# EAGLE board lightclock.0 (EAGLE 6.2)
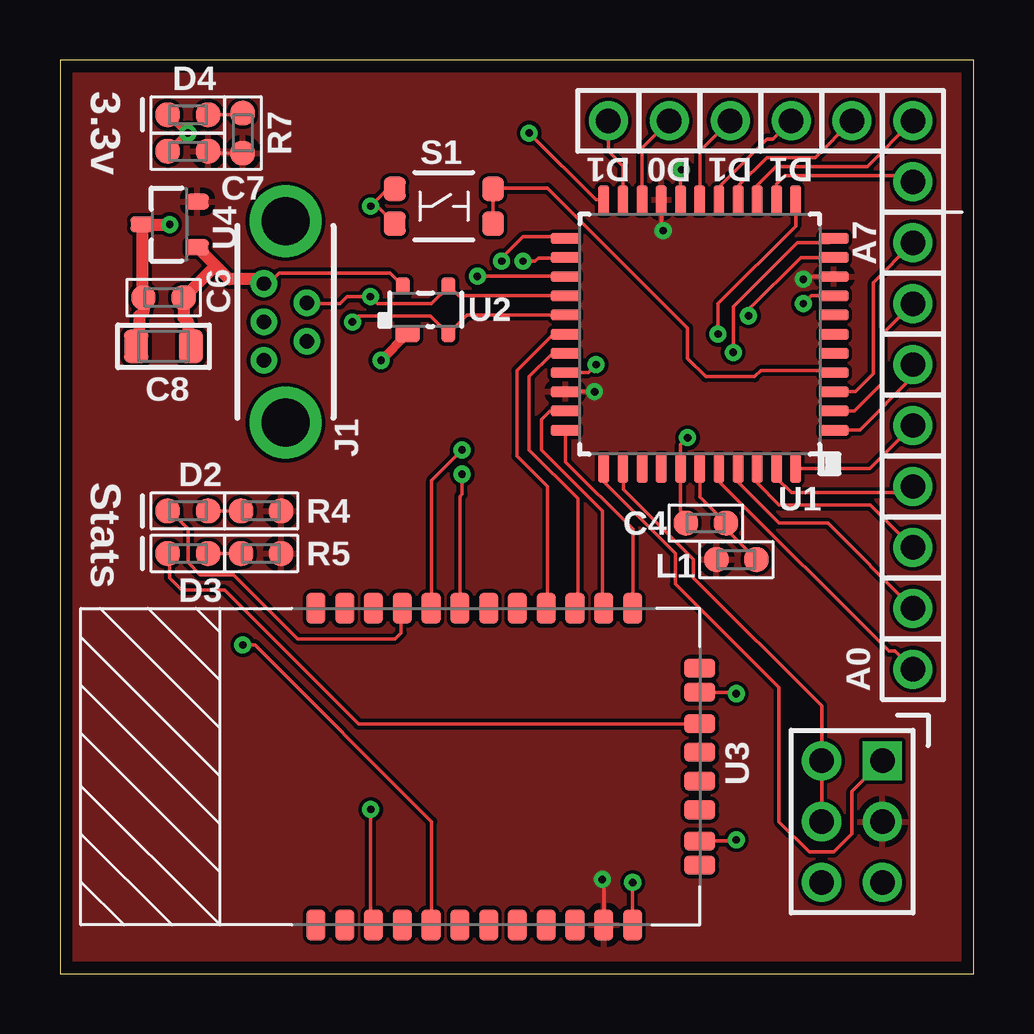
[diagram p0: board, top side]
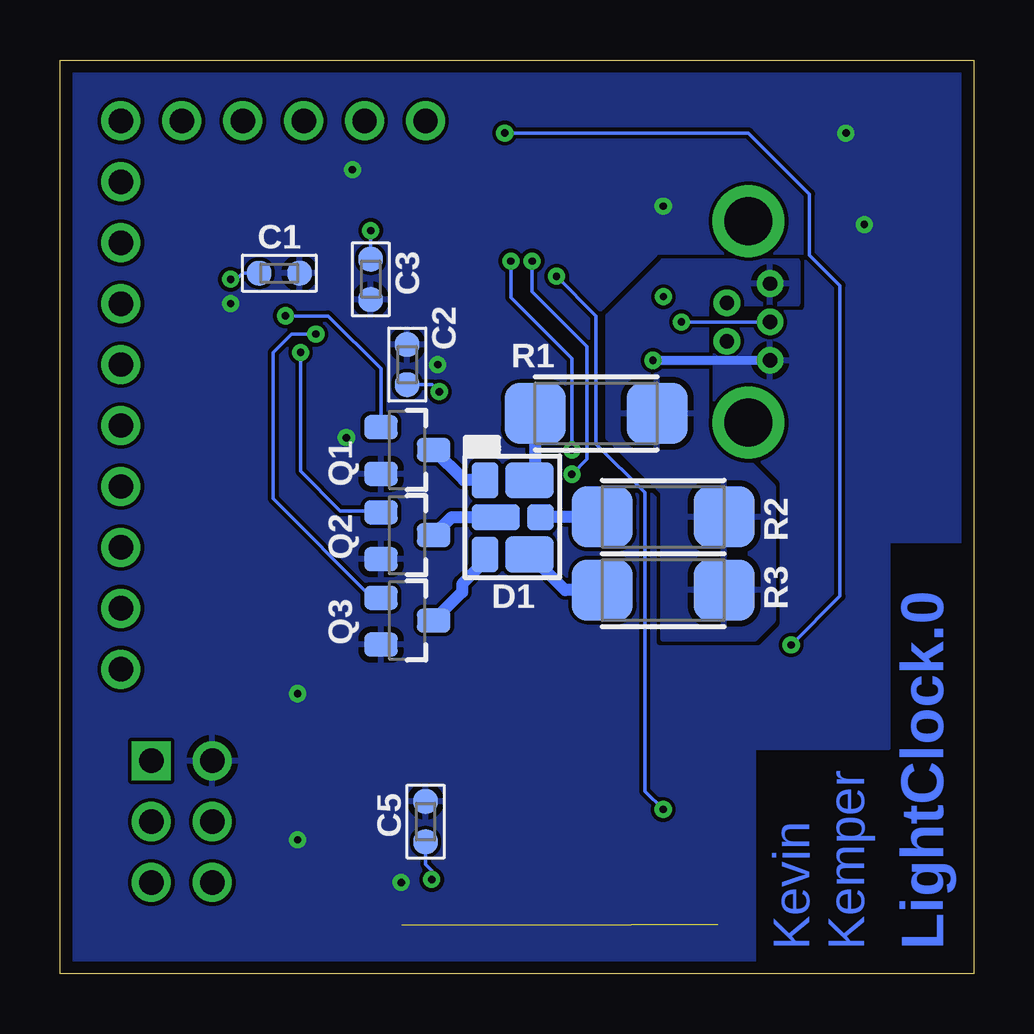
[diagram p1: board, bottom side, seen from below]

Size 38.1 x 38.1 mm. Coordinates in mm from the lower left corner, seen from the top.
Outline: 0,0 38.1,0 38.1,38.1 0,38.1 0,0
Copper layers (1*16): Top 0.035mm / dielectric 1.5mm / Bottom 0.035mm
Design rules: minimum track width 6mil, minimum drill 12mil, track to track 6mil, track to pad 6mil, pad to pad 6mil, via to via 6mil, smd to smd 6mil, copper to edge 20mil, drill to drill 8mil, minimum pad ring 10mil, minimum via ring 8mil, stop-mask expansion 4mil, vias tented up to drill 0mil, thermal gap 10mil

## Footprints (pad centres in the part's own frame; a part is rotated, then mirrored left to right if it is on the bottom)
0603 = smd 1.016 x 1.016: 1 0,0.838; 2 0,-0.838
0805 = smd 1.016 x 1.397: 1 -1.143,0; 2 1.143,0
LRTDC9TP-EAFB-GHQN = smd 2 x 1.5: A1 -0.524,-1.536; A3 -0.524,1.564 | smd 1.1 x 1.1: A2 -0.974,0.014 | smd 1.1 x 1.5: C1 1.326,-1.536; C3 1.326,1.564 | smd 2 x 1.1: C2 0.876,0.014
0603-POL = smd 1.016 x 1.016: 1 0,0.838; 2 0,-0.838
651005136421 = drill 0.6 pad 1.016: 1 0.9,-1.6; 2 -0.9,-0.8; 3 0.9,0; 4 -0.9,0.8; 5 0.9,1.6 | drill 2: 6 0,4.2; 7 0,-4.2
HEADER-1X1 = drill 1.016 pad 1.626: 1 0,0
HEADER-2X6 = drill 1.016 pad 1.626 square: 1 0,0 | drill 1.016 pad 1.626: 2 2.54,0; 3 5.08,0; 4 5.08,-2.54; 5 2.54,-2.54; 6 0,-2.54
SOT-23 = smd 1 x 1.4: 1 -0.95,-1.1; 2 1,-1.1; 3 0,1.1
2010 = smd 2.54 x 2.54: 1 -2.54,0; 2 2.54,0
KMR211GLFS = smd 0.9 x 1: 1 -2.05,-0.725; 2 -2.05,0.725; 3 2.05,-0.725; 4 2.05,0.725
ATXMEGA16A4U-AUR = smd 1.2 x 0.45: 1 -5.6,4; 2 -5.6,3.2; 3 -5.6,2.4; 4 -5.6,1.6; 5 -5.6,0.8; 6 -5.6,0; 7 -5.6,-0.8; 8 -5.6,-1.6; 9 -5.6,-2.4; 10 -5.6,-3.2; 11 -5.6,-4; 23 5.6,-4; 24 5.6,-3.2; 25 5.6,-2.4; 26 5.6,-1.6; 27 5.6,-0.8; 28 5.6,0; 29 5.6,0.8; 30 5.6,1.6; 31 5.6,2.4; 32 5.6,3.2; 33 5.6,4 | smd 0.45 x 1.2: 12 -4,-5.6; 13 -3.2,-5.6; 14 -2.4,-5.6; 15 -1.6,-5.6; 16 -0.8,-5.6; 17 0,-5.6; 18 0.8,-5.6; 19 1.6,-5.6; 20 2.4,-5.6; 21 3.2,-5.6; 22 4,-5.6; 34 4,5.6; 35 3.2,5.6; 36 2.4,5.6; 37 1.6,5.6; 38 0.8,5.6; 39 0,5.6; 40 -0.8,5.6; 41 -1.6,5.6; 42 -2.4,5.6; 43 -3.2,5.6; 44 -4,5.6
PRTR5V0U2X = smd 1 x 0.7: 1 -0.75,-1 | smd 0.6 x 0.7: 2 0.95,-1; 3 0.95,1; 4 -0.95,1
RN-42 = smd 1.3 x 0.8: 1 -13.2,16; 2 -13.2,14.8; 3 -13.2,13.6; 4 -13.2,12.4; 5 -13.2,11.2; 6 -13.2,10; 7 -13.2,8.8; 8 -13.2,7.6; 9 -13.2,6.4; 10 -13.2,5.2; 11 -13.2,4; 12 -13.2,2.8; 13 0,2.8; 14 0,4; 15 0,5.2; 16 0,6.4; 17 0,7.6; 18 0,8.8; 19 0,10; 20 0,11.2; 21 0,12.4; 22 0,13.6; 23 0,14.8; 24 0,16 | smd 0.8 x 1.3: 28 -3.5,0; 29 -9.7,0; 30 -2.5,0; 31 -4.8,0; 32 -6,0; 33 -7.2,0; 34 -8.4,0; 35 -10.7,0
AP7313-33SAG-7 = smd 0.65 x 0.95: 1 -0.95,-1.15; 2 0.95,-1.15; 3 0,1.15

## Placement (x,y rotation side)
C1  0.1 uF  [0603]  28.96,29.21 90 bottom
C2  0.1 uF  [0603]  23.62,25.4 180 bottom
C3  0.1 uF  [0603]  25.15,28.96 0 bottom
C4  0.1 uF  [0603]  26.92,18.8 270 top
C5  0.1 uF  [0603]  22.86,6.35 180 bottom
C6  1 uF  [0603]  4.32,28.19 270 top
C7  1 uF  [0603]  5.33,34.29 270 top
C8  10 uF  [0805]  4.32,26.16 180 top
D1  LED-LRTDC9TP  [LRTDC9TP-EAFB-GHQN]  19.05,19.05 180 bottom
D2  LED  [0603-POL]  5.33,19.3 270 top
D3  LED  [0603-POL]  5.33,17.53 270 top
D4  LED  [0603-POL]  5.33,35.81 270 top
J1  USB-MINI-651005136421  [651005136421]  9.4,27.18 180 top
J2  TESTPAD  [HEADER-1X1]  35.56,33.02 0 top
J3  TESTPAD  [HEADER-1X1]  35.56,35.56 0 top
J4  TESTPAD  [HEADER-1X1]  33.02,35.56 0 top
J5  TESTPAD  [HEADER-1X1]  30.48,35.56 0 top
J6  TESTPAD  [HEADER-1X1]  27.94,35.56 0 top
J7  TESTPAD  [HEADER-1X1]  25.4,35.56 0 top
J8  TESTPAD  [HEADER-1X1]  22.86,35.56 0 top
J9  HEADER-2X6  [HEADER-2X6]  34.29,8.89 270 top
J10  TESTPAD  [HEADER-1X1]  35.56,12.7 0 top
J11  TESTPAD  [HEADER-1X1]  35.56,15.24 0 top
J12  TESTPAD  [HEADER-1X1]  35.56,17.78 0 top
J13  TESTPAD  [HEADER-1X1]  35.56,20.32 0 top
J14  TESTPAD  [HEADER-1X1]  35.56,22.86 0 top
J15  TESTPAD  [HEADER-1X1]  35.56,25.4 0 top
J16  TESTPAD  [HEADER-1X1]  35.56,27.94 0 top
J17  TESTPAD  [HEADER-1X1]  35.56,30.48 0 top
L1  [0603]  28.19,17.27 90 top
Q1  BSS138  [SOT-23]  23.62,21.84 270 bottom
Q2  BSS138  [SOT-23]  23.62,18.29 270 bottom
Q3  BSS138  [SOT-23]  23.62,14.73 270 bottom
R1  18  [2010]  15.75,23.37 0 bottom
R2  9R1  [2010]  12.95,19.05 0 bottom
R3  13  [2010]  12.95,16 0 bottom
R4  750  [0603]  8.38,19.3 90 top
R5  750  [0603]  8.38,17.53 90 top
R7  750  [0603]  7.62,35.05 0 top
S1  KMR211GLFS  [KMR211GLFS]  16,32 0 top
U1  ATXMEGA-A4U  [ATXMEGA16A4U-AUR]  26.67,26.67 180 top
U2  DIODE-ESD-PRTR5V0U2X  [PRTR5V0U2X]  15.24,27.69 0 top
U3  RN-42  [RN-42]  26.67,15.24 90 top
U4  AP7313-33SAG-7  [AP7313-33SAG-7]  4.57,31.24 90 top

## Library data of the parts
C1-C8 D2-D4 L1 Q1-Q3 R1-R5 R7 = Kemper-Passives
D1 = Kemper-Passives; DIGIKEY: 475-2856-1-ND
J1 = Kemper-Connectors; DIGIKEY: 732-2735-ND
J2-J17 = Kemper-Connectors
S1 = Kemper-ElectroMechanical
U1 = Kemper-DigitalIC; DIGIKEY: ATXMEGA16A4U-AURCT-ND
U2 = Kemper-Passives; DIGIKEY: 568-4140-1-ND
U3 = Kemper-DigitalIC; SPARKFUN: WRL-10253
U4 = Kemper-DigitalIC

## Nets
+3V3: C1.1 C2.1 C3.1 C5.1 C7.1 J9.2 L1.1 R4.2 R5.2 R7.2 U1.9 U1.19 U1.31 U3.11 U4.2
+5V: C6.1 C8.1 J1.1 R1.2 R2.2 R3.2 U2.4 U4.1
BT_AUTO_DISC: U1.24 U3.20
BT_AUTO_MASTER: U1.25 U3.3
BT_CTS: U1.28 U3.16
BT_RESET: U1.22 U3.5
BT_RTS: U1.29 U3.15
BT_RX: U1.33 U3.13
BT_STATUS: U1.23 U3.19
BT_STATUS_LED: D2.2 U3.21
BT_TX: U1.32 U3.14
BT_TX/RX_STATUS_LED: D3.2 U3.31
D+: J1.3 U1.27 U2.2
D-: J1.2 U1.26 U2.3
GND: C1.2 C2.2 C3.2 C4.2 C5.2 C6.2 C7.2 C8.2 D4.2 J1.5 J9.6 Q1.2 Q2.2 Q3.2 S1.1 S1.2 U1.8 U1.18 U1.30 U1.38 U2.1 U3.1 U3.4 U3.12 U3.28 U3.29 U4.3
N$1: C4.1 L1.2 U1.39
N$2: D2.1 R4.1
N$3: D1.A1 R1.1
N$4: D1.A2 R2.1
N$5: D1.A3 R3.1
N$6: D3.1 R5.1
N$7: D1.C1 Q1.3
N$8: D1.C2 Q2.3
N$9: D1.C3 Q3.3
N$10: D4.1 R7.1
N$11: J7.1 U1.20
N$13: J8.1 U1.21
N$14: J6.1 U1.17
N$15: J5.1 U1.16
N$16: J4.1 U1.15
N$17: J3.1 U1.14
N$18: J2.1 U1.13
N$20: J10.1 U1.40
N$21: J11.1 U1.41
N$22: J12.1 U1.42
N$23: J13.1 U1.43
N$24: J14.1 U1.44
N$25: J15.1 U1.1
N$26: J16.1 U1.2
N$27: J17.1 U1.3
PDI_CLK: J9.5 U1.35
PDI_DATA: J9.1 U1.34
PWM_B: Q3.1 U1.12
PWM_G: Q2.1 U1.11
PWM_R: Q1.1 U1.10
SWITCH: S1.3 S1.4 U1.4

## Tracks (layer width: path | path; a pad name or v marks a point on that pad's centre or on a via)
+3V3  (via drill 0.3)
  Top 0.152: U1.31 v22.29,24.27 | C7.1 6.25,34.21 R7.2 | v30.99,28.96 31.1,29.07 U1.9 | v25.15,30.99 25.07,31.06 U1.19 | v22.61,3.94 22.67,3.87 U3.11
  Bottom 0.152: C2.1 22.58,24.56 v22.29,24.27 | C1.1 30.48,29.21 30.73,28.96 v30.99,28.96 | C3.1 v25.15,30.99 | C5.1 22.86,4.57 22.61,4.32 v22.61,3.94
  pour Top (rank 2): 0.25,37.85 37.85,37.85 37.85,0.25 0.25,0.25
+5V
  Top 0.152: U2.4 13.77,29.21 9.14,29.21 8.71,28.78 J1.1
  Top 0.508: C8.1 5.33,26.29 5.33,27.18 5.16,27.36 C6.1 6.4,29.44 6.58,29.44 | J1.1 8.32,28.96 7.06,28.96 6.58,29.44 | U4.1 6.58,29.44
  pour Bottom: 7.37,29.72 7.37,27.94 11.18,27.94 11.18,23.11 8.38,20.32 8.38,14.73 9.14,13.97 12.95,13.97 12.95,20.07 15.24,22.35 15.24,27.43 12.95,29.72
BT_AUTO_DISC  (via drill 0.3)
  Top 0.152: U3.20 15.49,15.26 15.49,20.57 v16.76,21.84 | U1.24 20.92,29.72 20.79,29.84 19.94,29.84 19.81,29.72 v19.3,29.72
  Bottom 0.152: v16.76,21.84 16.76,25.65 19.3,28.19 v19.3,29.72
BT_AUTO_MASTER  (via drill 0.3)
  Top 0.152: U3.3 12.95,2.16 v12.95,6.86 | U1.25 21.06,29.08 v17.4,29.08
  Bottom 0.152: v12.95,6.86 13.72,7.62 13.72,20.07 15.75,22.1 15.75,27.43 v17.4,29.08
BT_CTS
  Top 0.152: U1.28 20.57,26.67 19.05,25.15 19.05,21.59 20.32,20.32 20.32,15.29 U3.16
BT_RESET  (via drill 0.3)
  Top 0.152: U3.5 15.49,2.06 15.49,6.35 8.13,13.72 v7.62,13.72 | v19.56,35.05 22.34,32.27 U1.22
  Bottom 0.152: v7.62,13.72 5.59,15.75 5.59,28.7 6.86,29.97 6.86,32.51 9.4,35.05 v19.56,35.05
BT_RTS
  Top 0.152: U1.29 20.54,25.87 19.56,24.89 19.56,21.84 21.59,19.81 21.59,15.36 U3.15
BT_RX
  Top 0.152: U1.33 21.07,21.35 23.88,18.54 U3.13
BT_STATUS  (via drill 0.3)
  Top 0.152: U3.19 16.67,19.91 16.76,20 v16.76,20.83 | U1.23 21.01,30.73 19.3,30.73 18.41,29.84 v18.41,29.72
  Bottom 0.152: v16.76,20.83 16.13,21.46 16.13,26.16 18.41,28.45 v18.41,29.72
BT_STATUS_LED
  Top 0.152: D2.2 4.57,19.3 5.33,18.54 5.33,17.14 5.84,16.64 7.24,16.64 9.91,13.97 13.97,13.97 14.22,14.22 14.22,15.19 U3.21
BT_TX
  Top 0.152: U1.32 20.42,23.47 20.07,23.11 20.07,21.84 22.61,19.3 22.61,15.3 U3.14
BT_TX/RX_STATUS_LED
  Top 0.152: 4.57,17.53 D3.2 4.57,17.45 4.57,16.51 5.08,16 6.86,16 12.45,10.41 26.64,10.41 U3.31
D+  (via drill 0.3)
  Top 0.152: v12.19,27.18 12.45,27.43 15.44,27.43 U2.2 16.97,27.47 U1.27
  Bottom 0.152: J1.3 v12.19,27.18
D-  (via drill 0.3)
  Top 0.152: U1.26 16.61,28.27 U2.3 16.19,28.64 15.49,27.94 13.23,27.94 v12.94,28.23 11.98,28.23 11.68,27.94 10.34,27.94 J1.2
GND  (via drill 0.3)  (2 unrouted)
  Top 0.152: C4.2 25.87,19.34 U1.38 25.87,22.06 v26.16,22.35 | U1.30 22.02,25.07 v22.35,25.4 | U1.18 25.87,33.49 v25.91,33.53 | U1.8 31.32,28.27 v30.99,27.94 | U3.28 28.14,11.74 v28.19,11.68 | U3.12 v23.87,3.8 v23.88,3.81 | U3.29 28.15,5.54 v28.19,5.59 | S1.2 13.68,32.73 v12.95,32 13.23,32 S1.1
  Top 0.254: C7.2 5.26,35.05 | D4.2 5.26,35.05 | 5.26,35.05 v5.33,35.05
  Top 0.381: v13.38,25.58 U2.1
  Top 0.508: C8.2 3.3,26.29 3.3,27.43 3.48,27.61 C6.2 3.42,28.25 U4.3 v4.57,31.24
  Bottom 0.381: J1.5 v13.38,25.58
  pour Bottom (rank 2): 0.25,37.85 37.85,37.85 37.85,0.25 9.14,0.25 9.14,9.4 3.56,9.4 3.56,18.03 0.25,18.03
N$1
  Top 0.152: U1.39 26.67,19.89 C4.1 27.76,18.54 L1.2
N$2
  Top 0.152: D2.1 R4.1
N$3
  Bottom 0.508: R1.1 18.29,20.82 D1.A1
N$4
  Bottom 0.508: R2.1 18.06,19.05 D1.A2
N$5
  Bottom 0.508: R3.1 17.04,16 D1.A3
N$6
  Top 0.152: D3.1 R5.1
N$7
  Bottom 0.508: D1.C1 21.26,20.59 Q1.3
N$8
  Bottom 0.508: D1.C2 21.77,19.04 Q2.3
N$9
  Bottom 0.508: D1.C3 20.38,17.22 21.34,16.26 21.34,15.92 Q3.3
N$10
  Top 0.152: R7.1 7.54,35.81 D4.1
N$11
  Top 0.152: U1.20 24.27,34.43 J7.1
N$13
  Top 0.152: U1.21 23.47,33.68 22.86,34.29 J8.1
N$14
  Top 0.152: U1.17 26.67,34.29 J6.1
N$15
  Top 0.152: U1.16 27.47,32.8 29.46,34.8 29.72,34.8 J5.1
N$16
  Top 0.152: U1.15 28.27,32.84 29.46,34.04 31.5,34.04 J4.1
N$17
  Top 0.152: U1.14 29.07,32.88 29.84,33.66 33.66,33.66 J3.1
N$18
  Top 0.152: U1.13 29.87,32.92 30.23,33.27 35.31,33.27 J2.1
N$20
  Top 0.152: U1.40 27.47,20.54 34.54,13.46 34.8,13.46 J10.1
N$21
  Top 0.152: U1.41 28.27,20.5 29.97,18.8 32,18.8 J11.1
N$22
  Top 0.152: U1.42 29.07,20.46 29.97,19.56 33.78,19.56 J12.1
N$23
  Top 0.152: U1.43 29.87,20.68 30.48,20.07 35.31,20.07 J13.1
N$24
  Top 0.152: U1.44 33.77,21.07 J14.1
N$25
  Top 0.152: U1.1 33.34,22.67 35.56,24.89 J15.1
N$26
  Top 0.152: U1.2 33.12,23.47 34.29,24.64 34.29,26.67 J16.1
N$27
  Top 0.152: U1.3 33.16,24.27 33.91,25.02 33.91,28.83 J17.1
PDI_CLK
  Top 0.152: J9.5 31.75,11.18 26.42,16.51 26.42,17.27 23.5,20.19 23.5,21.05 U1.35
PDI_DATA
  Top 0.152: U1.34 22.61,21.01 22.61,20.57 25.65,17.53 25.65,16.26 29.97,11.94 29.97,6.35 31.24,5.08 32.26,5.08 33.02,5.84 33.02,7.62 J9.1
PWM_B  (via drill 0.3)
  Top 0.152: U1.12 30.67,31.18 27.43,27.94 v27.43,26.67
  Bottom 0.152: Q3.1 25.08,15.68 29.21,19.81 29.21,25.91 28.45,26.67 v27.43,26.67
PWM_G  (via drill 0.3)
  Top 0.152: U1.11 32.08,30.48 30.73,30.48 28.07,27.81 v28.07,25.91
  Bottom 0.152: Q2.1 24.79,19.3 26.42,19.3 28.07,20.95 v28.07,25.91
PWM_R  (via drill 0.3)
  Top 0.152: U1.10 30.89,29.87 28.7,27.69 v28.7,27.43
  Bottom 0.152: Q1.1 24.72,25.23 26.92,27.43 v28.7,27.43
SWITCH
  Top 0.152: U1.4 32.19,25.15 29.21,25.15 28.96,24.89 26.92,24.89 26.16,25.65 26.16,26.92 20.32,32.77 18.09,32.77 S1.4 S1.3

## Text on the board
Bottom: LightClock.0 | Kemper | Kevin
tPlace: 3.3v | D1 | D0 | D1 | D1 | A7 | Stats | A0